# Altium PCB СФ МЭИ ЛБ ПЭ2-18 11.03.04 0.PcbDoc
Units mm, origin at the board's own origin, x right, y up, seen from the top; angles counter-clockwise.
Board outline 45.77 x 29.32 mm, 2 copper layers (Top Layer, Bottom Layer); 22 components, 14 nets, 54 pads, 5 vias.
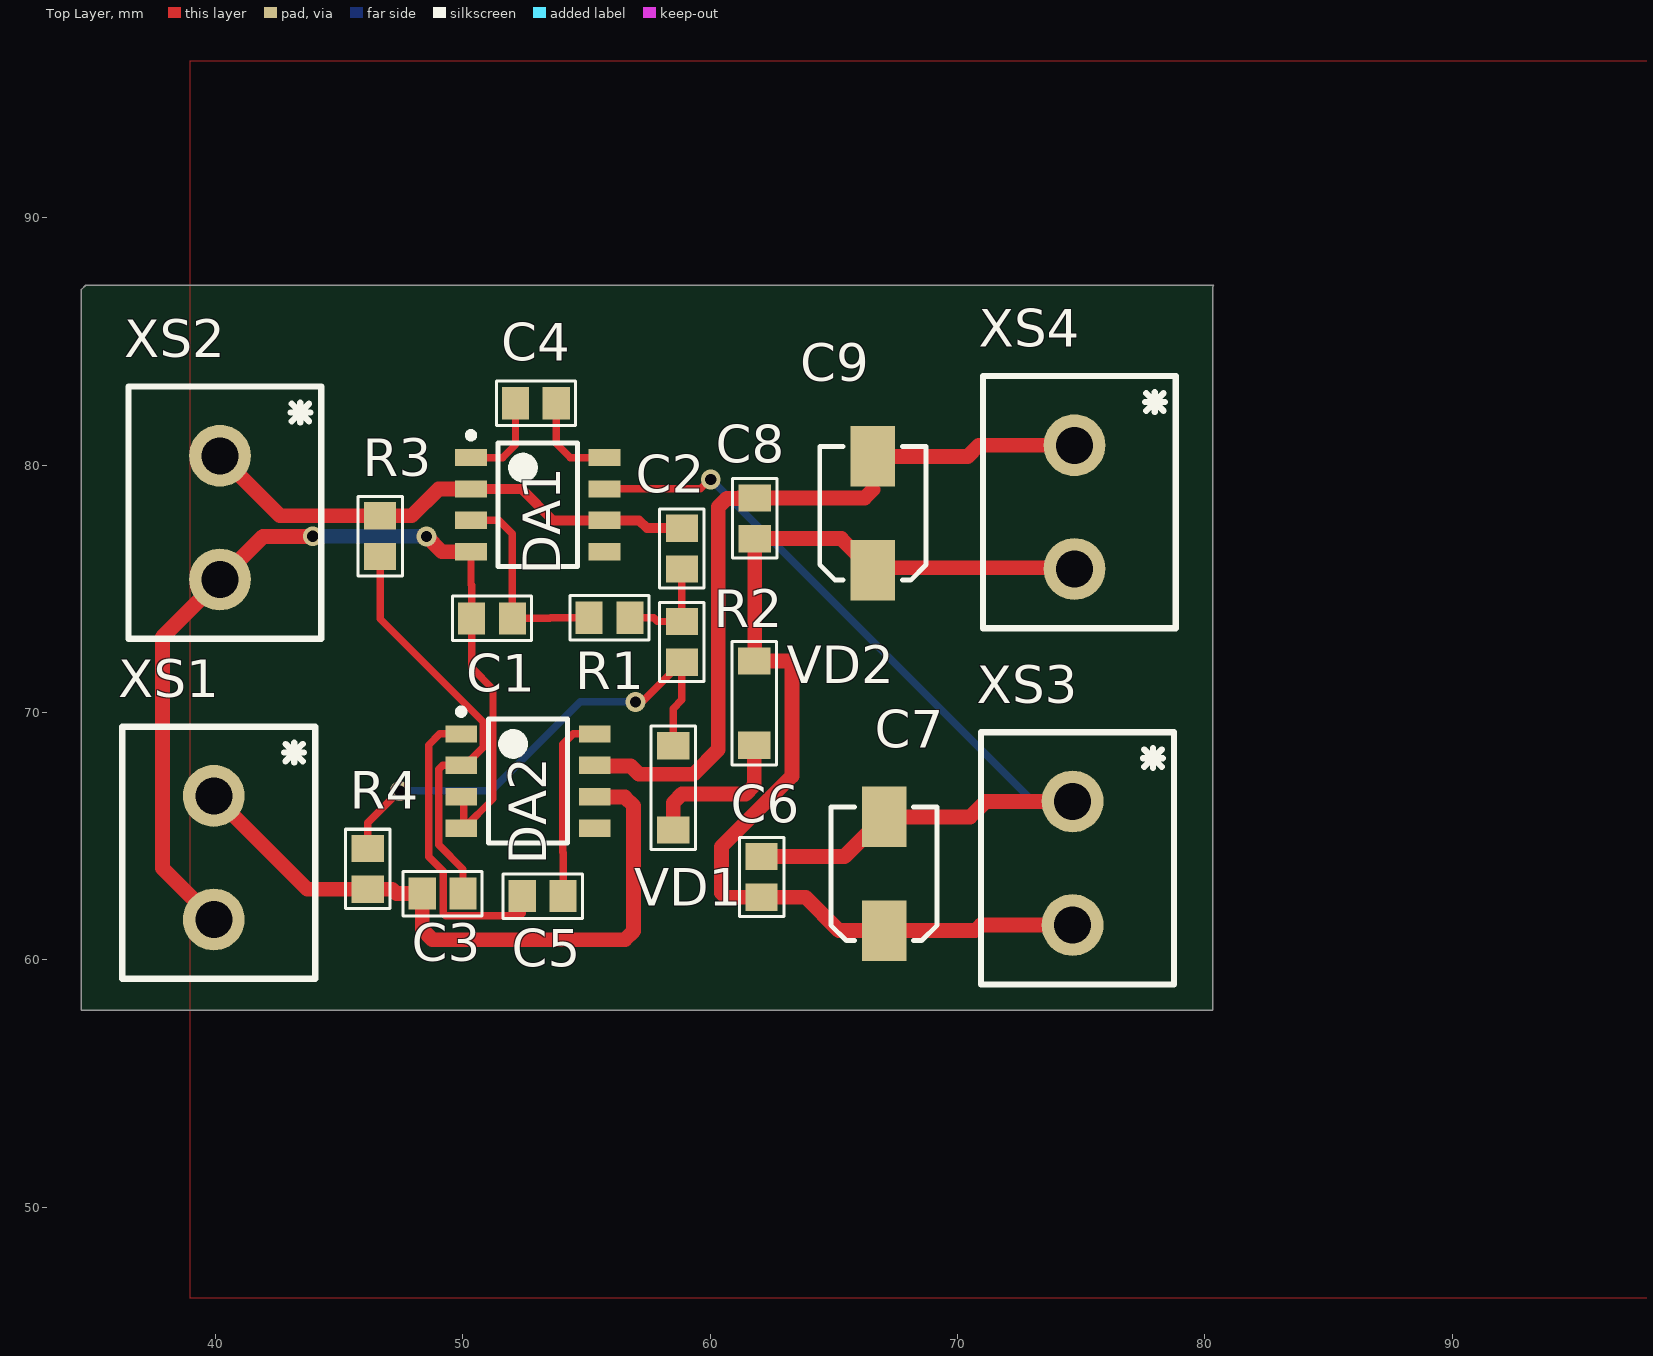
[diagram p0: Top Layer view]
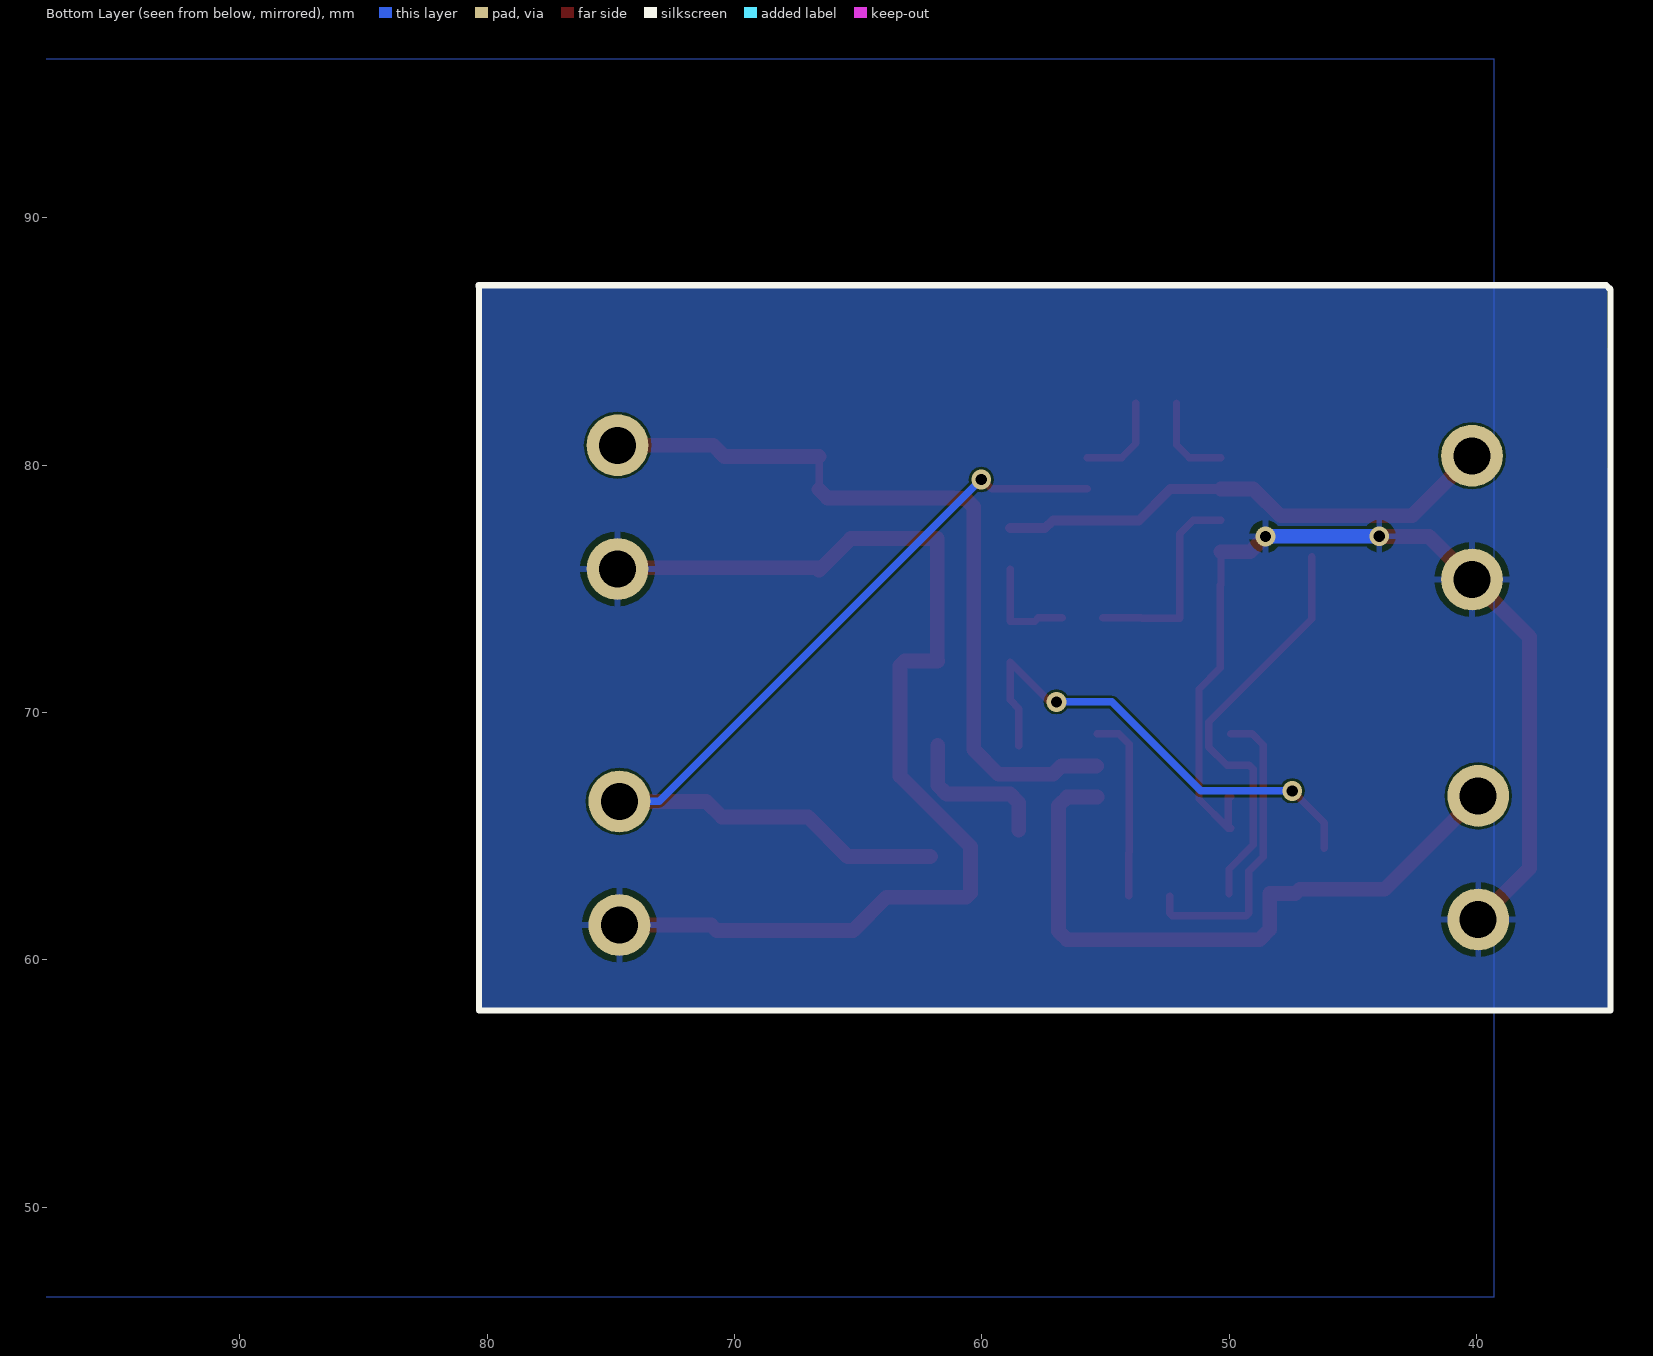
[diagram p1: Bottom Layer view, seen from below]
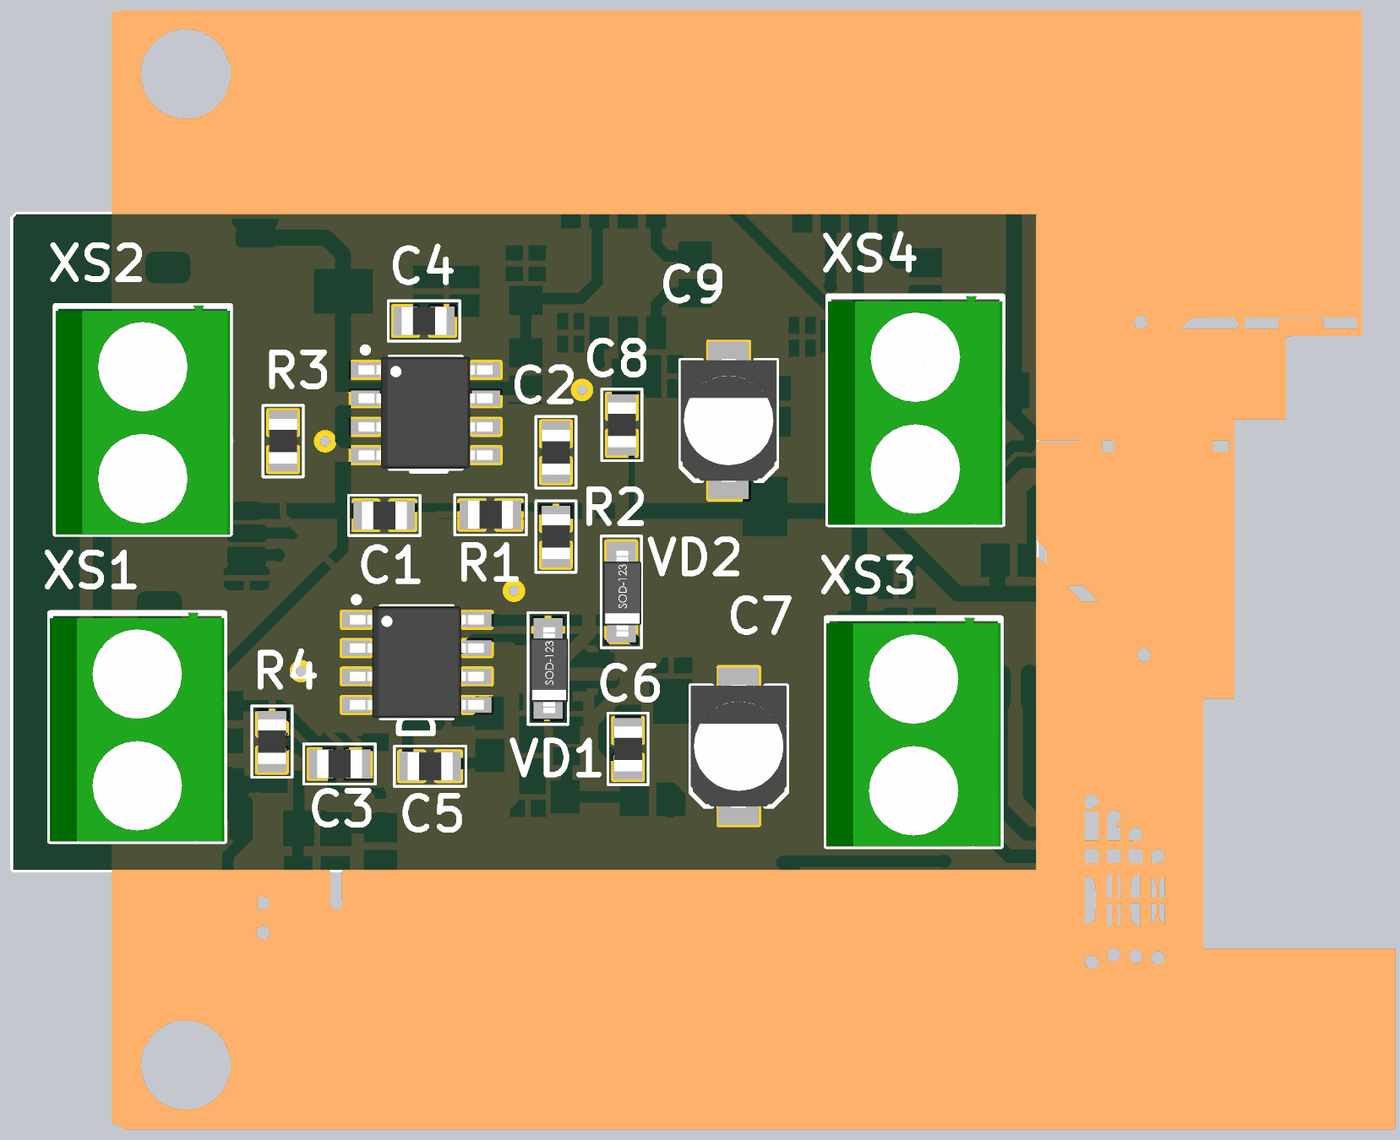
[diagram p2: 3D render of the assembled board from above, using the file's embedded part models]

## Layer stack, top to bottom
Top Solder: solder mask 0.0102, Solder Resist, Dk 3.5
Top Layer: signal copper 0.0356
Dielectric 1: dielectric 0.32, FR-4, Dk 4.8
Bottom Layer: signal copper 0.0356
Bottom Solder: solder mask 0.0102, Solder Resist, Dk 3.5

## Board outline
34.575,57.95 34.575,87.1 34.75,87.275 80.35,87.275 80.325,87.2 80.325,57.95

## Design rules (kind name [scope] priority, off if disabled: settings)
Clearance [All] p1: gap=0.1 ignorepadtopadclearanceinfootprint=FALSE except(0: Arc-Hole Track-Hole SMDPad-Hole THPad-Hole Via-Hole Fill-Hole Poly-Hole Region-Hole Text-Hole)
MinimumAnnularRing MinimumAnnularRing_1 [All] p1: minimumring=0.254
MinimumAnnularRing [All] p2: minimumring=0.254
PolygonConnect [All] p1: connectstyle=Relief reliefconductorwidth=0.254 reliefentries=4 polygonreliefangle="90 Angle" airgapwidth=0.254
RoutingVias [All] p1: holewidth=0.45 width=0.8 viastyle="Through Hole" minholewidth=0.45 minwidth=0.8 maxholewidth=0.45 maxwidth=0.8
SolderMaskExpansion [All] p1: expansion=0.102 istentingtop=FALSE
Width [All] p1: maxlimit=1 minlimit=0.1 preferedwidth=0.3
30 further rules are at their usual default settings.

## Components (designator, comment, footprint, x,y, rotation, side; value= is the part's Value field where it differs from the comment)
C1 "0.047u" 0805 51.175,73.8 r0 top
C2 "1000" 0805 58.85,76.625 r270 top
C3 "0.015u" 0805 49.175,62.675 r0 top
C4 "0.068u" 0805 52.95,82.5 r180 top
C5 "0.068u" 0805 53.225,62.575 r180 top
C6 "0.068u" 0805 62.075,63.35 r90 top
C7 "1000" "ECAP SMD, 1 мкФ, 50В, Конденсатор электролитический алюминиевый SMD" 67.025,63.475 r90 top
C8 "0.068u" 0805 61.8,77.85 r90 top
C9 "1000" "ECAP SMD, 1 мкФ, 50В, Конденсатор электролитический алюминиевый SMD" 66.575,78.05 r90 top
DA1 "КФ140УД18" SOIC-8 53.025,78.4 r0 top
DA2 "КФ140УД18" SOIC-8 52.625,67.225 r0 top
R1 "7,5k" 0805 55.925,73.825 r0 top
R2 "18k" 0805 58.85,72.85 r90 top
R3 "18k" 0805 46.65,77.125 r90 top
R4 "18k" 0805 46.15,63.675 r90 top
VD1 "MMSZ5235B" SOD-123 58.5,66.95 r90 top
VD2 "MMSZ5235B" SOD-123 61.775,70.375 r90 top
XS1 "DG126-5.0-0.2P" DG126-5.0-02P 39.925,61.625 r0 top
XS2 "DG126-5.0-0.2P" DG126-5.0-02P 40.175,75.375 r0 top
XS3 "DG126-5.0-0.2P" DG126-5.0-02P 74.65,61.4 r0 top
XS4 "DG126-5.0-0.2P" DG126-5.0-02P 74.725,75.8 r0 top
ZBOAS194492846 "Comment" "BOASVIEWassembly:Вид спереди для сборочного:4:1:0:101" 49.4,2358.3 r0 top

## Footprints (in the part's own frame and the unit in brackets; to place one, negate y for a bottom-side part, rotate by r counter-clockwise, add the part's x,y. Pads: shape width x height; smd on the part's side, far side on the other; paste and mask are expansions set on the pad)
0805 [mm] "Чип (SMD)"
  rect 1.1x1.3 smd: 1(-0.825,0) 2(0.825,0)
  silkscreen extent -1.6,-0.9 1.6,0.9, body extent -1,-0.63 1,0.63, height 0.5
"BOASVIEWassembly:Вид спереди для сборочного:4:1:0:101" [mm]
DG126-5.0-02P [mm]
  round 2.5 hole 1.5: 1(0,5) 2(0,0)
  silkscreen extent -3.7,-2.4 4.1,7.8, body extent -3.7,-2.42 4.1,7.82, height 9.95
"ECAP SMD, 1 мкФ, 50В, Конденсатор электролитический алюминиевый SMD" [mm] "ECAP SMD, 1 мкФ, 50В, Конденсатор электролитический алюминиевый SMD"
  rect 2.45x1.8 smd: 1(-2.3,0) 2(2.3,0)
  silkscreen extent -2.7,-2.15 2.7,2.15, body extent -2.75,-2.15 2.75,2.15, height 5.4
SOD-123 [mm] "(SMD)"
  rect 1.1x1.3 smd: 1(-1.7,0) 2(1.7,0)
  silkscreen extent -2.5,-0.9 2.5,0.9, body extent -2,-0.9 1.85,0.8, height 1.37
SOIC-8 [mm] "SOIC, 8-Leads, Body 4,90x3,90mm, Pitch 1,27mm, IPC Medium Density"
  rect 1.28x0.7 smd: 1(-2.7,1.905) 2(-2.7,0.635) 3(-2.7,-0.635) 4(-2.7,-1.905) 5(2.7,-1.905) 6(2.7,-0.635) 7(2.7,0.635) 8(2.7,1.905)
  silkscreen extent -2.82,-2.5 1.6,2.93, body extent -3,-2.5 3,2.5, height 1.75

## Part data
C1: library part "К53-68\"R\"-25В-0.047 мкФ ±10% 0805_3", "К53-68\"R\"-25В-0.047 мкФ ±10%"
C2: library part "К53-68\"R\"-25В-1000 пФ ±10% 0805_2", "К53-68\"R\"-25В-1000 пФ ±10%"
C3: library part "К53-68\"R\"-25В-0.015 мкФ ±10% 0805_1", "К53-68\"R\"-25В-0.015 мкФ ±10%"
C4 C5 C6 C8: library part "К53-68\"R\"-25В-0.068 мкФ ±10% 0805", "К53-68\"R\"-25В-0.068 мкФ ±10%"
C7 C9: library part "SMD Конденсатор полярный", "К53-68\"R\"-25В-1000 пФ ±10%"
R1: library part "0.125Вт 0805 7,5 кОм, 5%, Чип резистор (SMD)", "0805-0.125 Вт -7,5 кОм±5%"
R2 R3 R4: library part "0.125Вт 0805 18 кОм, 5%, Чип резистор (SMD)", "0805-0.125 Вт -18 кОм±5%"

## Via types
v1: diameter 0.8, hole 0.45, Top Layer to Bottom Layer, 5 vias

## Nets (pads, with @x,y where several pads share a name; then routed paths per layer and width w, separated by ;. In a path a pad name is that pad's centre, name@x,y a point inside that pad or via, vN(x,y) a via of type N, cw(c..) or ccw(c..) an arc to the next point about the centre after c; other vN are vias at no path point)
NetC1_1: C1.1 C6.1 C7.1 C8.1 C9.1 DA1.4 DA2.3 DA2.4 VD2.2 XS1.2 XS2.2 XS3.2 XS4.2 | length 85.9
  Top Layer w0.3: DA2.4 DA2.4@50.035,65.32 ; DA2.3 50.035,66.59 DA2.4@50.035,65.32 ; DA1.4 50.325,75.158 50.35,75.133 C1.1 50.35,71.799 51.215,70.934 51.215,66.5 DA2.4@50.035,65.32 ; VD2.2 VD2.2@61.8,72.1 ; C9.1 C9.1@66.675,75.85 ; XS4.2@74.675,75.85 XS4.2
  Top Layer w0.6: XS1.2 37.85,63.7 37.85,73.05 XS2.2 41.914,77.114 43.914,77.114 v1(43.925,77.125) ; v1(48.53,77.114) 49.149,76.495 DA1.4 ; VD2.2 63.124,72.075 63.3,71.899 63.3,67.418 60.45,64.568 60.45,62.701 60.626,62.525 C6.1 63.856,62.525 65.206,61.175 C7.1 70.714,61.175 70.939,61.4 XS3.2 ; VD2.2@61.8,72.1 C8.1 65.3,77.025 C9.1 ; C9.1@66.675,75.85 XS4.2@74.675,75.85
  Bottom Layer w0.3: v1(43.925,77.125) v1@43.93,77.12 ; v1@48.524,77.12 v1(48.53,77.114) ; XS3.2@74.425,61.625 XS3.2
  Bottom Layer w0.6: v1@43.93,77.12 v1@48.524,77.12
NetC1_2: C1.2 DA1.3 R1.1 | length 8.4
  Top Layer w0.3: DA1.3 51.451,77.765 52,77.216 C1.2 53.518,73.8 53.543,73.825 R1.1
NetC2_1: C2.1 DA1.2 DA1.6 R3.2 XS2.1 | length 20.8
  Top Layer w0.4: DA1.2 52.375,79.035 53.645,77.765 DA1.6 57.125,77.765 57.44,77.45 C2.1
  Top Layer w0.6: XS2.1 42.6,77.95 R3.2 47.93,77.95 49.015,79.035 DA1.2
NetC2_2: C2.2 R1.2 R2.2 | length 4.3
  Top Layer w0.3: R1.2 57.709,73.825 57.859,73.675 R2.2 C2.2
NetC3_1: C3.1 DA2.6 R4.1 XS1.1 | length 27.2
  Top Layer w0.6: XS1.1 43.7,62.85 R4.1 47.142,62.85 47.317,62.675 C3.1 48.35,61.226 48.768,60.808 56.549,60.808 56.9,61.159 56.9,66.224 56.549,66.575 55.34,66.575 DA2.6
NetC3_2: C3.2 DA2.2 R3.1 | length 17
  Top Layer w0.3: R3.1 46.65,73.778 50.815,69.613 50.815,68.595 50.08,67.86 DA2.2 49.174,67.86 49.022,67.708 49.022,64.643 50,63.665 C3.2
NetC4_1: C4.1 DA1.8 | length 3.8
  Top Layer w0.3: C4.1 53.775,80.874 54.344,80.305 DA1.8
NetC4_2: C4.2 DA1.1 | length 3.7
  Top Layer w0.3: DA1.1 51.613,80.305 52.125,80.817 C4.2
NetC5_1: C5.1 DA2.8 | length 7.6
  Top Layer w0.3: C5.1 54.05,64.32 54.035,64.335 54.035,68.707 54.458,69.13 DA2.8
NetC5_2: C5.2 DA2.1 | length 12.5
  Top Layer w0.3: DA2.1 49.064,69.13 48.616,68.682 48.616,64.16 49.2,63.576 49.2,61.874 49.301,61.773 52.298,61.773 52.4,61.874 C5.2
NetC6_2: C6.2 C7.2 DA1.7 XS3.1 | length 38
  Top Layer w0.3: DA1.7 59.595,79.035 59.974,79.415 v1(60.02,79.415)
  Top Layer w0.6: C6.2 65.425,64.175 C7.2 70.51,65.775 71.135,66.4 XS3.1
  Bottom Layer w0.3: v1(60.02,79.415) 60.031,79.415 73.046,66.4 XS3.1
NetC8_2: C8.2 C9.2 DA2.7 XS4.1 | length 31.6
  Top Layer w0.3: DA2.7 DA2.7@55.352,67.833 ; 66.575,79.007 C9.2
  Top Layer w0.6: DA2.7@55.352,67.833 56.784,67.833 57.117,67.5 59.325,67.5 60.325,68.5 60.325,78.304 60.676,78.655 61.174,78.655 61.154,78.675 C8.2 66.243,78.675 66.575,79.007 ; C9.2 70.409,80.35 70.859,80.8 XS4.1
NetR2_1: R2.1 R4.2 VD1.2 | length 19.9
  Top Layer w0.3: R4.2 46.15,65.532 v1(47.445,66.827) ; v1(56.975,70.425) 57.25,70.425 R2.1 58.85,70.505 58.5,70.155 VD1.2
  Bottom Layer w0.3: v1(47.445,66.827) 51.14,66.827 54.737,70.425 v1(56.975,70.425)
NetVD1_1: VD1.1 VD2.1 | length 6.3
  Top Layer w0.6: VD1.1 58.5,66.349 58.851,66.7 61.424,66.7 61.775,67.051 VD2.1
pads on no net: DA1.5 DA2.5

## Polygon pours and split planes (outlines as drawn)
NetC1_1 on Bottom Layer "NETC1_1_L02_P016" (solid, pour order 16): 34.725,87.175 80.35,87.175 80.35,57.95 34.6,57.95
no net on Bottom Layer "GND A" (solid, shelved, pour order 7): 39.275,46.375 39.275,96.4 142.075,96.4 142.075,46.375
no net on Top Layer "GND A" (solid, shelved, pour order 6): 38.981,46.316 38.981,96.341 141.781,96.341 141.781,46.316
no net on Top Overlay "NONET_L01_P-001" (solid): 39.325,73.95

## Silkscreen, mask and mechanical layers (free items; w line width, h text height)
Bottom Overlay:
  lines w0.254: 80.35,87.225 80.325,87.2 80.325,57.95 34.575,57.95 34.575,58.45 34.575,87.1 34.75,87.275 80.35,87.275
Mechanical 7:
  text "BOASFORMAT|А3|101|0|883070867|165354330|1000000000|4:1|" at 0,2540 h0
  text "DimPos|37490157|960078740|3651574|-19921260|10|2286542" at 85.95,2489.2 h0
  text "DimPos|70147638|965501969|-4645669|-13946850|4|1178539" at 189.975,2487.8 h0
  text "DimPos|50334646|966938976|-5639763|-11624016|7|1416598" at 142.175,2485.55 h0
  text "DimPos|52431102|962509843|-12844489|-15610236|8|1584121" at 165.8,2484.425 h0
  text "DimPos|23543307|961515748|11407480|-14940945|2|1772217" at 30.825,2480.2 h0
  text "DimPos|86751969|958966535|-23031496|-11181103|2|1772217" at 278.85,2464.175 h0
  text "DimPos|50226378|935944882|-9291339|11958662|7|1416598" at 151.175,2346.925 h0
  text "DimPos|37155512|935944882|2765748|14832677|10|2286542" at 87.35,2339.625 h0
  text "DimPos|66938976|932401575|-2549213|13061024|4|1178539" at 176.5,2335.125 h0
  text "DimPos|24645669|932185039|9625984|15059055|2|1772217" at 38.15,2329.5 h0
  text "DimPos|84645669|933179134|0|17165354|2|1772217" at 215,2326.675 h0
  text "SET2|Superlayer=MechanicalLayer7|Wsuperlayer=MechanicalLayer8|Layergrid=MechanicalLayer9|Werase=MechanicalLayer11|Layermark=MechanicalLayer12|Layerstamp=MechanicalLayer13|Thinline=0,18|Basicline=0,6|Gridline=0,18|Boardline=0,6|Contourpolygonline=0,6|PcbGridStep=1,25|PcbGridCleareanceAtView=0|PcbGridNumberEach=l4|PcbGridLineEach=l2|PcbGridCountSecondaryStrip=1|PcbGridEnabledStrip=True|PcbSignalGridEnabled=True|PcbSignalShowBukva=True|RealSignalLayerNames=False|PcbGridEnabledBothSide=False|RealLayerNames=False|SilkShowPad=True|SilkViewName=Слой маркировки|SilkShowHole=True|SilkShowAxis=True|SilkShowBukva=True|SilkShowGrid=False|SolderShowGrid=False|SolderViewName=Слой маски|SolderShowAxis=False|SolderShowBukva=False|MainViewShowGrid=False|MainViewUseShapesDrill=False|ShowBukvaOnSboky=True|Density=2,2|TableName=Таблица 1|RazrezWidth=100|Sher=Rz 160|Asstoplayer=TopOverlay|Asstoplayer2=MechanicalLayer15|Assbottomlayer=MechanicalLayer2|Assbottomlayer2=MechanicalLayer15|AssMinDiameterHoles=2|AssDim=False|AssMech=True|AssSilk=False|AssComponentSilk=False|AssFreeSilk=False|AssSmdPads=False|AssGridEnable=False|Mirror=Horisontal|PcbGridFontSize=5|PcbGridCenterZero=False|TTStampDistance=12|MainFontSize=5|PolyStep=2|PcbDrillDrawingGridEnabled=False|PcbDrillDrawingViewName=Слой сверловки|PcbDrillDrawingShowBukva=False|PcbDrillDrawingShowAxis=False|PcbSignalLayersUseDrill=False|PcbSignalLayersUseShapesDrill=False|PcbSignalLayersShowAxis=False" at 0,0.025 h0
  text "2TT0008# 9.Радиатор прикрепить при помощи клей теплопроводный Радиал" at 0,0 h0
  text "2TT0007#  8 Клеймить." at 0,0 h0
  text "2TT0006#  7 Маркировать обозначение и заводской номер печатного узла черной краской МКЭ ОСТ 4ГО.054.2050М2 шрифтом 3,5 или 5 тип А ГОСТ 2.304-81, вместе, удобном для чтения." at 0,0 h0
  text "2TT0005#  6 Покрытие лак УР-231 ТУ6-21-14-90(3). Допускается покрытие лаком ЭП-730 ГОСТ 20824-81(3)." at 0,0 h0
  text "2TT0004#  5 Элементы поверхностного монтажа паять припойной пастой ПОС-61 ЛОК ТУ 400 К''Р''-1805-22-91, флюс ФПС-3 ТУ400 СП \"ЭВ\"-2178-137-98." at 0,0 h0
  text "2TT0003#  4 Меры защиты от статического электричества по ОСТ 92-1615-74. Степень жесткости II по ОСТ11.073.062-2001." at 0,0 h0
  text "2TT0002#  3** Размеры обеспеч. инстр." at 0,0 h0
  text "2TT0001#  2* Размеры для справок." at 0,0 h0
  text "2TT0000#  1 Установку элементов производить по чертежу." at 0,0 h0
  text "TT0005#" at 0,0 h0
  text "TT0004#  5 Конфигурацию печатных проводников выдерживать по координатной сетке с отклонениями от чертежа ±1,5 мм." at 0,0 h0
  text "TT0003#  4 Шаг координатной сетки 1,25 мм. Линии сетки нанесены через одну." at 0,0 h0
  text "TT0002#  3 Печатная плата должна соответствовать ГОСТ Р 53429-2009, группе жесткости 3 при верхнем значении температуры окружающей среды (85±2) °С." at 0,0 h0
  text "TT0001#  2 Класс точности 3 по ГОСТ Р 53429-2009." at 0,0 h0
  text "TT0000#  1 *  Размер для справок." at 0,0 h0
  text "STAMP|Наименование1|Стабилизатор" at 0,0 h0
  text "STAMP|Наименование2|напряжения" at 0,0 h0
  text "STAMP|Обозначение|СФ МЭИ ЛБ ПЭ2-18 11.03.04 03" at 0,0 h0
  text "STAMP|Масса|120 г" at 0,0 h0
  text "STAMP|Разработал|Гончаренко В.Ю." at 0,0 h0
  text "STAMP|Проверил|Смолин В.А." at 0,0 h0
  text "STAMP|Утвердил|Рассказа Д.С." at 0,0 h0
  text "STAMP|Var|Нач. отд." at 0,0 h0
  text "STAMP|Tech|Т.контр." at 0,0 h0
  text "STAMP|Normo|Н.контр." at 0,0 h0
  text "STAMP|Check|Пров." at 0,0 h0
  text "STAMP|Design|Разраб." at 0,0 h0
  text "STAMP|Utv|Утв." at 0,0 h0
  text "STAMP|Первичная применяемость|СФ МЭИ ЛБ ПЭ2-18 11.03.04 03" at 0,0 h0
  text "STAMP|Организация|НИУ СФ МЭИ ПЭ2-18" at 0,0 h0
  text "2STAMP|Организация|НИУ СФ МЭИ ПЭ2-18" at 0,0 h0
  text "2STAMP|Масса|69 г" at 0,0 h0
  text "2STAMP|Первичная применяемость|СФ МЭИ ЛБ ПЭ2-18 11.03.04 0" at 0,0 h0
  text "2STAMP|Наименование1|Генератор" at 0,0 h0
  text "2STAMP|ТипДокумента|Сборочный чертёж" at 0,0 h0
  text "2STAMP|Наименование2|Синусоидальных импульсов" at 0,0 h0
  text "2STAMP|Разработал|Саленков В.А." at 0,0 h0
  text "2STAMP|Проверил|Смолин В.А." at 0,0 h0
  text "2STAMP|Утвердил|Рассказа Д.С." at 0,0 h0
  text "2STAMP|Var|Нач. отд." at 0,0 h0
  text "2STAMP|Tech|Т.контр." at 0,0 h0
  text "2STAMP|Normo|Н.контр." at 0,0 h0
  text "2STAMP|Check|Пров." at 0,0 h0
  text "2STAMP|Design|Разраб." at 0,0 h0
  text "2STAMP|Utv|Утв." at 0,0 h0
  text "2STAMP|Обозначение|СФ МЭИ ЛБ ПЭ2-18 11.03.04  СБ" at 0,0 h0
  text "BOASVIADRILLTABLE:none,177165,5," at 0,0 h0
  text "2BOASDRILLTABLE:triangle,590551,Да,8,True," at 0,0 h0
Mechanical 9:
  circle w0.6: c94.375,2377.3 r0.2
  circle w0.6: c127.575,2377.3 r0.2
  circle w0.6: c170.025,2368.3 r0.2
  circle w0.6: c178.175,2452.375 r0.2
  circle w0.6: c133.175,2444.775 r0.2
  circle w0.6: c127.85,2456.025 r0.2
  circle w0.6: c95.225,2438.6 r0.2
  circle w0.6: c59.8,2442.25 r0.2
  circle w0.6: c62.6,2367.75 r0.2
  circle w0.6: c215,2370.275 r0.2
  circle w0.6: c220.35,2435.775 r0.2
  lines w0.18: 21.324,2480.2 30.825,2480.2 59.8,2442.25 ; 28.649,2329.5 38.15,2329.5 62.6,2367.75 ; 75.142,2489.2 85.95,2489.2 95.225,2438.6 ; 76.542,2339.625 87.35,2339.625 94.375,2377.3 ; 127.575,2377.3 151.175,2346.925 159.773,2346.925 ; 127.85,2456.025 142.175,2485.55 150.773,2485.55 ; 133.175,2444.775 165.8,2484.425 174.824,2484.425 ; 170.025,2368.3 176.5,2335.125 184.493,2335.125 ; 178.175,2452.375 189.975,2487.8 197.968,2487.8 ; 205.499,2326.675 215,2326.675 215,2370.275 ; 220.35,2435.775 278.85,2464.175 288.351,2464.175
  text "10" at 77.642,2491.73 h10.75
  text "4" at 192.475,2490.33 h10.75
  text "7" at 144.675,2488.08 h10.75
  text "8" at 168.3,2486.955 h10.75
  text "2" at 23.824,2482.73 h10.75
  text "2" at 281.35,2466.705 h10.75
  text "7" at 153.675,2349.455 h10.75
  text "10" at 79.042,2342.155 h10.75
  text "4" at 179,2337.655 h10.75
  text "2" at 31.149,2332.03 h10.75
  text "2" at 207.999,2329.205 h10.75
Mechanical 13:
  lines w0.18: 230,2253 295,2253 ; 230,2258 295,2258 ; 230,2263 295,2263 ; 230,2268 295,2268 ; 230,2273 295,2273 ; 230,2288 295,2288 ; 230,2293 295,2293 ; 230,2298 295,2298 ; 369.96,2268 369.96,2283 ; 374.98,2268 374.98,2283
  lines w0.6: 8,2273 20,2273 ; 8,2308 20,2308 ; 8,2333 20,2333 ; 8,2358 20,2358 ; 8,2475 20,2475 ; 13,2248 13,2393 ; 13,2415 13,2535 ; 20,2393 8,2393 8,2248 20,2248 ; 20,2415 8,2415 8,2535 20,2535 ; 20,2521 90,2521 90,2535 ; 230,2248 230,2303 415,2303 ; 230,2278 295,2278 ; 230,2283 295,2283 ; 237,2278 237,2303 ; 247,2248 247,2303 ; 270,2248 270,2303 ; 285,2248 285,2303 ; 295,2248 295,2303 415,2303 ; 295,2263 365,2263 415,2263 ; 295,2288 415,2288 ; 365,2248 365,2288 ; 365,2268 415,2268 ; 365,2283 380,2283 415,2283 ; 380,2268 380,2288 ; 385.57,2263 385.57,2268 ; 397,2268 397,2288 ; 415,2311 415,2303 ; 20,2248 415,2248 415,2535 20,2535 ; 20,2248 20,2535
  text "СФ МЭИ ЛБ ПЭ2-18 11.03.04  СБ" at 88.487,2530.109 h7.68 r180
  text "Перв. примен." at 11.976,2494.373 h5.38 r90
  text "СФ МЭИ ЛБ ПЭ2-18 11.03.04 0" at 17.976,2483.004 h5.38 r90
  text "Справ. №" at 11.976,2437.78 h5.38 r90
  text "Подп. и дата" at 11.976,2365.961 h5.38 r90
  text "Инв. № дубл." at 11.976,2336.457 h5.38 r90
  text "1 Установку элементов производить по чертежу. /   2* Размеры для справок. /   3** Размеры обеспеч. инстр. /   4 Меры защиты от статического электричества по ОСТ 92-1615-74. Степень жесткости II по ОСТ11.073.062-2001. /   5 Элементы поверхностного монтажа паять припойной пастой ПОС-61 ЛОК ТУ 400 К''Р''-1805-22-91, флюс ФПС-3 ТУ400 СП \"ЭВ\"-2178-137-98.  /   6 Покрытие лак УР-231 ТУ6-21-14-90(3). Допускается покрытие лаком ЭП-730 ГОСТ 20824-81(3). /   7 Маркировать обозначение и заводской номер печатного узла черной краской МКЭ ОСТ 4ГО.054.2050М2 шрифтом 3,5 или 5 тип А ГОСТ 2.304-81, вместе, удобном для чтения. /   8 Клеймить. /  9.Радиатор прикрепить при помощи клей теплопроводный Радиал" at 235,2323 h7.68
  text "Взам. инв. №" at 11.976,2311.496 h5.38 r90
  text "СФ МЭИ ЛБ ПЭ2-18 11.03.04  СБ" at 321.513,2293.391 h7.68
  text "Лит." at 369.328,2284.024 h5.38
  text "Масса" at 384.108,2284.024 h5.38
  text "Масштаб" at 399.133,2284.024 h5.38
  text "Подп. и дата" at 11.976,2282.461 h5.38 r90
  text "Генератор" at 318.577,2280.891 h7.68
  text "Изм." at 230.687,2279.024 h5.38
  text "Лист" at 238.024,2279.024 h5.38
  text "№ докум." at 252.271,2279.024 h5.38
  text "Подп." at 273.92,2279.024 h5.38
  text "Дата" at 285.963,2279.024 h5.38
  text "Разраб." at 230.533,2273.771 h5.38
  text "Саленков В.А." at 247.68,2273.771 h5.38
  text "69 г" at 383.792,2273.391 h7.68
  text "4:1" at 403.065,2273.391 h7.68
  text "Синусоидальных импульсов" at 301.165,2272.891 h7.68
  text "Пров." at 230.533,2268.771 h5.38
  text "Смолин В.А." at 247.68,2268.771 h5.38
  text "Сборочный чертёж" at 316.094,2265.524 h5.38
  text "Т.контр." at 230.533,2263.771 h5.38
  text "Лист" at 366.442,2263.771 h5.38
  text "Листов" at 387.485,2263.771 h5.38
  text "1" at 407.424,2263.771 h5.38
  text "Нач. отд." at 230.533,2258.771 h5.38
  text "Н.контр." at 230.533,2253.771 h5.38
  text "НИУ СФ МЭИ ПЭ2-18" at 368.285,2253.391 h7.68
  text "Инв. № подл." at 11.976,2251.457 h5.38 r90
  text "Утв." at 230.533,2248.771 h5.38
  text "Рассказа Д.С." at 247.68,2248.771 h5.38
  text "Копировал" at 305.533,2243.771 h5.38
  text "Формат А3" at 386.625,2243.771 h5.38

## Text inside footprints (layer, text, board x,y; h text height)
ZBOAS194492846: Mechanical 12 "XS4" at 194.555,2465.628 h6.1; Mechanical 12 "XS3" at 194.206,2408.016 h6.1; Mechanical 12 "C9" at 165.665,2460.087 h6.1; Mechanical 12 "C2" at 139.022,2442.053 h6.1; Mechanical 12 "VD2" at 163.475,2411.253 h6.1; Mechanical 12 "VD1" at 138.79,2375.253 h6.1; Mechanical 12 "C3" at 102.822,2366.253 h6.1; Mechanical 12 "R2" at 151.622,2420.253 h6.1; Mechanical 12 "C6" at 154.422,2388.653 h6.1; Mechanical 12 "DA2" at 124.547,2381.875 h6.1 r90; Mechanical 12 "R4" at 92.823,2390.944 h6.1; Mechanical 12 "C7" at 177.722,2400.753 h6.1; Mechanical 12 "C8" at 152.022,2446.853 h6.1; Mechanical 12 "C4" at 117.261,2463.372 h6.1; Mechanical 12 "DA1" at 126.847,2428.79 h6.1 r90; Mechanical 12 "R1" at 129.237,2410.253 h6.1; Mechanical 12 "C1" at 111.637,2409.853 h6.1; Mechanical 12 "C5" at 119.022,2365.353 h6.1; Mechanical 12 "R3" at 94.889,2444.735 h6.1; Mechanical 12 "XS2" at 56.306,2463.916 h6.1; Mechanical 12 "XS1" at 55.306,2408.916 h6.1